# EAGLE board TQFP64-0mm8 (EAGLE 6.4)
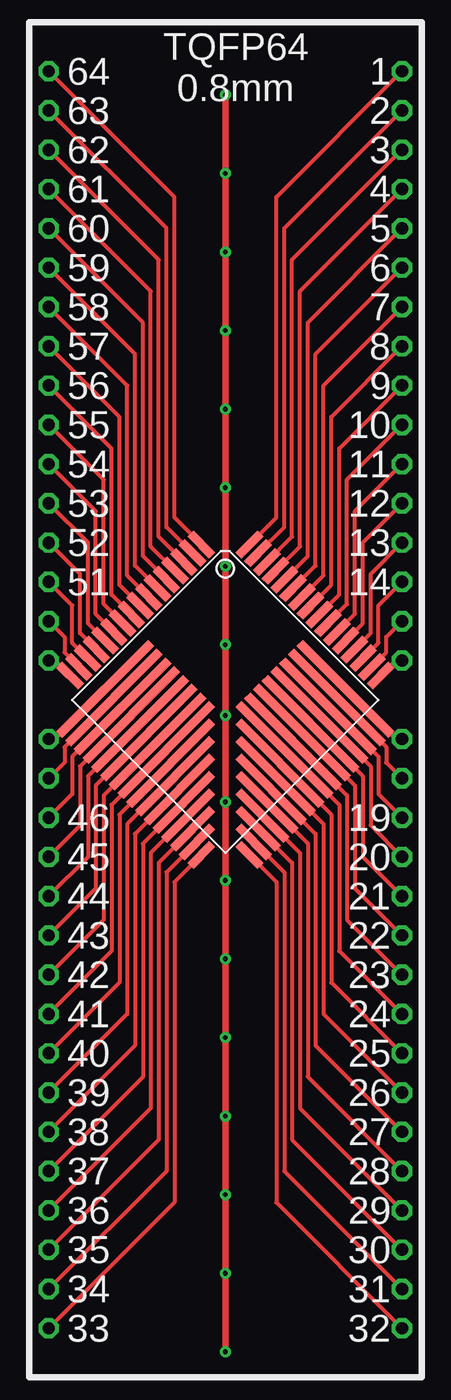
[diagram p0: board, top side]
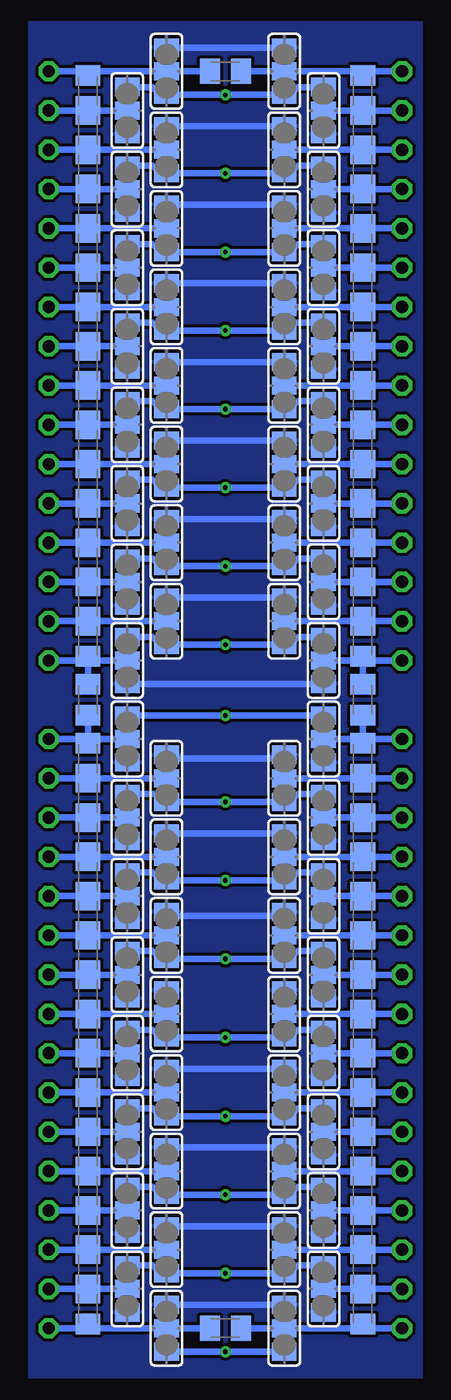
[diagram p1: board, bottom side, seen from below]

No outline drawn. Coordinates in mm, seen from the top.
Copper layers (1*16): Top 0.035mm / dielectric 1.5mm / Bottom 0.035mm
Design rules "default": minimum track width 10mil, minimum drill 0.6mm, track to track 8mil, track to pad 8mil, pad to pad 8mil, via to via 8mil, smd to smd 8mil, copper to edge 40mil, drill to drill 8mil, minimum pad ring 10mil, minimum via ring 8mil, stop-mask expansion 4mil, vias tented up to drill 0mil, thermal gap 10mil
Net classes: 1 pwr: width 0.254 mm

## Footprints (pad centres in the part's own frame; a part is rotated, then mirrored left to right if it is on the bottom)
1 = drill 0.8 octagon: P$1 0,0
TQFP64 = smd 2 x 0.55: 1 -8.2,6; 2 -8.2,5.2; 3 -8.2,4.4; 4 -8.2,3.6; 5 -8.2,2.8; 6 -8.2,2; 7 -8.2,1.2; 8 -8.2,0.4; 9 -8.2,-0.4; 10 -8.2,-1.2; 11 -8.2,-2; 12 -8.2,-2.8; 13 -8.2,-3.6; 14 -8.2,-4.4; 15 -8.2,-5.2; 16 -8.2,-6; 33 8.2,-6 | smd 0.55 x 8.4: 17 -6,-5; 18 -5.2,-5; 19 -4.4,-5; 20 -3.6,-5; 21 -2.8,-5; 22 -2,-5; 23 -1.2,-5; 24 -0.4,-5 | smd 0.55 x 7.6: 25 0.4,-5.4 | smd 0.55 x 6.8: 26 1.2,-5.8 | smd 0.55 x 6: 27 2,-6.2 | smd 0.55 x 5.2: 28 2.8,-6.6 | smd 0.55 x 4.4: 29 3.6,-7 | smd 0.55 x 3.6: 30 4.4,-7.4 | smd 0.55 x 2.8: 31 5.2,-7.8 | smd 0.55 x 2: 32 6,-8.2; 49 6,8.2; 50 5.2,8.2; 51 4.4,8.2; 52 3.6,8.2; 53 2.8,8.2; 54 2,8.2; 55 1.2,8.2; 56 0.4,8.2; 57 -0.4,8.2; 58 -1.2,8.2; 59 -2,8.2; 60 -2.8,8.2; 61 -3.6,8.2; 62 -4.4,8.2; 63 -5.2,8.2; 64 -6,8.2 | smd 2.8 x 0.55: 34 7.8,-5.2 | smd 3.6 x 0.55: 35 7.4,-4.4 | smd 4.4 x 0.55: 36 7,-3.6 | smd 5.2 x 0.55: 37 6.6,-2.8 | smd 6 x 0.55: 38 6.2,-2 | smd 6.8 x 0.55: 39 5.8,-1.2 | smd 7.6 x 0.55: 40 5.4,-0.4 | smd 8.4 x 0.55: 41 5,0.4; 42 5,1.2; 43 5,2; 44 5,2.8; 45 5,3.6; 46 5,4.4; 47 5,5.2; 48 5,6
C0805K = smd 1.3 x 1.6: 1 -1,0; 2 1,0
SJ_2 = smd 1.168 x 1.6: 1 -1.524,0; 2 0,0; 3 1.524,0

## Placement (x,y rotation side)
E$68  [1]  1.35,84.43 0 top
E$315  [1]  1.35,3.15 0 top
E$316  [1]  1.35,5.69 0 top
E$317  [1]  1.35,8.23 0 top
E$318  [1]  1.35,10.77 0 top
E$319  [1]  1.35,13.31 0 top
E$320  [1]  1.35,15.85 0 top
E$321  [1]  1.35,18.39 0 top
E$322  [1]  1.35,23.47 0 top
E$323  [1]  1.35,26.01 0 top
E$324  [1]  1.35,28.55 0 top
E$325  [1]  1.35,31.09 0 top
E$326  [1]  1.35,33.63 0 top
E$327  [1]  1.35,36.17 0 top
E$328  [1]  1.35,38.71 0 top
E$329  [1]  1.35,41.25 0 top
E$330  [1]  1.35,46.33 0 top
E$331  [1]  1.35,48.87 0 top
E$332  [1]  1.35,51.41 0 top
E$333  [1]  1.35,53.95 0 top
E$334  [1]  1.35,56.49 0 top
E$335  [1]  1.35,59.03 0 top
E$336  [1]  1.35,61.57 0 top
E$337  [1]  1.35,64.11 0 top
E$338  [1]  1.35,66.65 0 top
E$339  [1]  1.35,69.19 0 top
E$340  [1]  1.35,71.73 0 top
E$341  [1]  1.35,74.27 0 top
E$342  [1]  1.35,76.81 0 top
E$343  [1]  1.35,79.35 0 top
E$344  [1]  1.35,81.89 0 top
E$345  [1]  24.21,84.43 0 top
E$346  [1]  24.21,5.69 0 top
E$347  [1]  24.21,8.23 0 top
E$348  [1]  24.21,10.77 0 top
E$349  [1]  24.21,13.31 0 top
E$350  [1]  24.21,15.85 0 top
E$351  [1]  24.21,18.39 0 top
E$352  [1]  24.21,20.93 0 top
E$353  [1]  24.21,23.47 0 top
E$354  [1]  24.21,26.01 0 top
E$355  [1]  24.21,28.55 0 top
E$356  [1]  24.21,31.09 0 top
E$357  [1]  24.21,33.63 0 top
E$358  [1]  24.21,36.17 0 top
E$359  [1]  24.21,38.71 0 top
E$360  [1]  24.21,41.25 0 top
E$361  [1]  24.21,46.33 0 top
E$362  [1]  24.21,48.87 0 top
E$363  [1]  24.21,51.41 0 top
E$364  [1]  24.21,53.95 0 top
E$365  [1]  24.21,56.49 0 top
E$366  [1]  24.21,59.03 0 top
E$367  [1]  24.21,61.57 0 top
E$368  [1]  24.21,64.11 0 top
E$369  [1]  24.21,66.65 0 top
E$370  [1]  24.21,69.19 0 top
E$371  [1]  24.21,71.73 0 top
E$372  [1]  24.21,74.27 0 top
E$373  [1]  24.21,76.81 0 top
E$374  [1]  24.21,79.35 0 top
E$375  [1]  24.21,81.89 0 top
E$376  [TQFP64]  12.79,43.79 315 top
E$377  [1]  1.35,20.93 0 top
E$378  [1]  24.21,3.15 0 top
E$379  [C0805K]  21.68,4.42 270 bottom
E$380  [C0805K]  21.68,9.5 270 bottom
E$381  [C0805K]  21.68,14.58 270 bottom
E$382  [C0805K]  21.68,19.66 270 bottom
E$383  [C0805K]  21.68,24.74 270 bottom
E$384  [C0805K]  21.68,29.82 270 bottom
E$385  [C0805K]  21.68,34.9 270 bottom
E$386  [C0805K]  21.68,39.98 270 bottom
E$387  [C0805K]  21.68,6.96 270 bottom
E$388  [C0805K]  21.68,12.04 270 bottom
E$389  [C0805K]  21.68,17.12 270 bottom
E$390  [C0805K]  21.68,22.2 270 bottom
E$391  [C0805K]  21.68,27.28 270 bottom
E$392  [C0805K]  21.68,32.36 270 bottom
E$393  [C0805K]  21.68,37.44 270 bottom
E$394  [C0805K]  21.68,43.79 270 bottom
E$395  [C0805K]  21.68,47.6 270 bottom
E$396  [C0805K]  21.68,52.68 270 bottom
E$397  [C0805K]  21.68,57.76 270 bottom
E$398  [C0805K]  21.68,62.84 270 bottom
E$399  [C0805K]  21.68,67.92 270 bottom
E$400  [C0805K]  21.68,73 270 bottom
E$401  [C0805K]  21.68,78.08 270 bottom
E$402  [C0805K]  21.68,83.16 270 bottom
E$403  [C0805K]  21.68,50.14 270 bottom
E$404  [C0805K]  21.68,55.22 270 bottom
E$405  [C0805K]  21.68,60.3 270 bottom
E$406  [C0805K]  21.68,65.38 270 bottom
E$407  [C0805K]  21.68,70.46 270 bottom
E$408  [C0805K]  21.68,75.54 270 bottom
E$409  [C0805K]  21.68,80.62 270 bottom
E$410  [C0805K]  3.9,83.16 90 bottom
E$411  [C0805K]  3.9,78.08 90 bottom
E$412  [C0805K]  3.9,73 90 bottom
E$413  [C0805K]  3.9,67.92 90 bottom
E$414  [C0805K]  3.9,62.84 90 bottom
E$415  [C0805K]  3.9,57.76 90 bottom
E$416  [C0805K]  3.9,52.68 90 bottom
E$417  [C0805K]  3.9,47.6 90 bottom
E$418  [C0805K]  3.9,80.62 90 bottom
E$419  [C0805K]  3.9,75.54 90 bottom
E$420  [C0805K]  3.9,70.46 90 bottom
E$421  [C0805K]  3.9,65.38 90 bottom
E$422  [C0805K]  3.9,60.3 90 bottom
E$423  [C0805K]  3.9,55.22 90 bottom
E$424  [C0805K]  3.9,50.14 90 bottom
E$425  [C0805K]  3.9,43.79 90 bottom
E$426  [C0805K]  3.9,39.98 90 bottom
E$427  [C0805K]  3.9,34.9 90 bottom
E$428  [C0805K]  3.9,29.82 90 bottom
E$429  [C0805K]  3.9,24.74 90 bottom
E$430  [C0805K]  3.9,19.66 90 bottom
E$431  [C0805K]  3.9,14.58 90 bottom
E$432  [C0805K]  3.9,9.5 90 bottom
E$433  [C0805K]  3.9,4.42 90 bottom
E$434  [C0805K]  3.9,37.44 90 bottom
E$435  [C0805K]  3.9,32.36 90 bottom
E$436  [C0805K]  3.9,27.28 90 bottom
E$437  [C0805K]  3.9,22.2 90 bottom
E$438  [C0805K]  3.9,17.12 90 bottom
E$439  [C0805K]  3.9,12.04 90 bottom
E$440  [C0805K]  3.9,6.96 90 bottom
E$441  [C0805K]  12.79,84.43 180 bottom
E$442  [C0805K]  12.79,3.15 180 bottom
E$443  [SJ_2]  6.43,81.89 270 bottom
E$444  [SJ_2]  8.97,84.43 90 bottom
E$445  [SJ_2]  8.97,79.35 90 bottom
E$446  [SJ_2]  6.43,76.81 90 bottom
E$447  [SJ_2]  8.97,74.27 90 bottom
E$448  [SJ_2]  6.43,71.73 270 bottom
E$449  [SJ_2]  8.97,69.19 90 bottom
E$450  [SJ_2]  6.43,66.65 90 bottom
E$451  [SJ_2]  8.97,64.11 90 bottom
E$452  [SJ_2]  6.43,46.33 270 bottom
E$453  [SJ_2]  8.97,48.87 270 bottom
E$454  [SJ_2]  6.43,51.41 270 bottom
E$455  [SJ_2]  8.97,53.95 90 bottom
E$456  [SJ_2]  6.43,56.49 270 bottom
E$457  [SJ_2]  8.97,59.03 270 bottom
E$458  [SJ_2]  6.43,61.57 270 bottom
E$459  [SJ_2]  6.43,41.25 270 bottom
E$460  [SJ_2]  8.97,38.71 90 bottom
E$461  [SJ_2]  6.43,36.17 90 bottom
E$462  [SJ_2]  8.97,33.63 90 bottom
E$463  [SJ_2]  6.43,31.09 270 bottom
E$464  [SJ_2]  8.97,28.55 90 bottom
E$465  [SJ_2]  6.43,26.01 90 bottom
E$466  [SJ_2]  8.97,23.47 90 bottom
E$467  [SJ_2]  6.43,5.69 270 bottom
E$468  [SJ_2]  8.97,8.23 270 bottom
E$469  [SJ_2]  6.43,10.77 270 bottom
E$470  [SJ_2]  8.97,13.31 90 bottom
E$471  [SJ_2]  6.43,15.85 270 bottom
E$472  [SJ_2]  8.97,18.39 270 bottom
E$473  [SJ_2]  6.43,20.93 270 bottom
E$474  [SJ_2]  8.97,3.15 270 bottom
E$475  [SJ_2]  16.59,84.43 90 bottom
E$476  [SJ_2]  19.14,81.89 90 bottom
E$477  [SJ_2]  16.59,79.35 90 bottom
E$478  [SJ_2]  19.14,76.81 90 bottom
E$479  [SJ_2]  16.59,74.27 90 bottom
E$480  [SJ_2]  19.14,71.73 90 bottom
E$481  [SJ_2]  19.14,66.65 90 bottom
E$482  [SJ_2]  16.59,69.19 90 bottom
E$483  [SJ_2]  16.59,64.11 90 bottom
E$484  [SJ_2]  19.14,61.57 90 bottom
E$485  [SJ_2]  16.59,59.03 90 bottom
E$486  [SJ_2]  19.14,56.49 90 bottom
E$487  [SJ_2]  19.14,51.41 90 bottom
E$488  [SJ_2]  16.59,53.95 90 bottom
E$489  [SJ_2]  16.59,48.87 90 bottom
E$490  [SJ_2]  19.14,46.33 90 bottom
E$491  [SJ_2]  16.59,18.39 90 bottom
E$492  [SJ_2]  19.14,41.25 90 bottom
E$493  [SJ_2]  19.14,36.17 90 bottom
E$494  [SJ_2]  16.59,38.71 90 bottom
E$495  [SJ_2]  16.59,33.63 90 bottom
E$496  [SJ_2]  19.14,31.09 90 bottom
E$497  [SJ_2]  16.59,28.55 90 bottom
E$498  [SJ_2]  19.14,26.01 90 bottom
E$499  [SJ_2]  19.14,20.93 90 bottom
E$500  [SJ_2]  16.59,23.47 90 bottom
E$501  [SJ_2]  16.59,3.15 90 bottom
E$502  [SJ_2]  19.14,15.85 90 bottom
E$503  [SJ_2]  16.59,13.31 90 bottom
E$504  [SJ_2]  19.14,10.77 90 bottom
E$505  [SJ_2]  19.14,5.69 90 bottom
E$506  [SJ_2]  16.59,8.23 90 bottom

## Library data of the parts
E$68 E$315-E$378 = drill
E$379-E$442 = ref-packages
E$443-E$506 = jumper

## Nets
S$148: E$330.P$1 E$376.16 E$417.1 E$425.2 E$452.2
S$149: E$331.P$1 E$376.15 E$417.2 E$424.1 E$453.2
S$150: E$332.P$1 E$376.14 E$416.1 E$424.2 E$454.2
S$151: E$333.P$1 E$376.13 E$416.2 E$423.1 E$455.2
S$152: E$334.P$1 E$376.12 E$415.1 E$423.2 E$456.2
S$153: E$335.P$1 E$376.11 E$415.2 E$422.1 E$457.2
S$154: E$336.P$1 E$376.10 E$414.1 E$422.2 E$458.2
S$155: E$337.P$1 E$376.9 E$414.2 E$421.1 E$451.2
S$156: E$338.P$1 E$376.8 E$413.1 E$421.2 E$450.2
S$157: E$339.P$1 E$376.7 E$413.2 E$420.1 E$449.2
S$158: E$340.P$1 E$376.6 E$412.1 E$420.2 E$448.2
S$159: E$341.P$1 E$376.5 E$412.2 E$419.1 E$447.2
S$160: E$342.P$1 E$376.4 E$411.1 E$419.2 E$446.2
S$161: E$343.P$1 E$376.3 E$411.2 E$418.1 E$445.2
S$162: E$329.P$1 E$376.17 E$425.1 E$426.2 E$459.2
S$163: E$328.P$1 E$376.18 E$426.1 E$434.2 E$460.2
S$164: E$327.P$1 E$376.19 E$427.2 E$434.1 E$461.2
S$165: E$326.P$1 E$376.20 E$427.1 E$435.2 E$462.2
S$166: E$325.P$1 E$376.21 E$428.2 E$435.1 E$463.2
S$167: E$324.P$1 E$376.22 E$428.1 E$436.2 E$464.2
S$168: E$323.P$1 E$376.23 E$429.2 E$436.1 E$465.2
S$169: E$322.P$1 E$376.24 E$429.1 E$437.2 E$466.2
S$170: E$321.P$1 E$376.26 E$430.1 E$438.2 E$472.2
S$171: E$320.P$1 E$376.27 E$431.2 E$438.1 E$471.2
S$172: E$319.P$1 E$376.28 E$431.1 E$439.2 E$470.2
S$173: E$318.P$1 E$376.29 E$432.2 E$439.1 E$469.2
S$174: E$317.P$1 E$376.30 E$432.1 E$440.2 E$468.2
S$175: E$316.P$1 E$376.31 E$433.2 E$440.1 E$467.2
S$176: E$315.P$1 E$376.32 E$433.1 E$442.1 E$474.2
S$177: E$68.P$1 E$376.1 E$410.2 E$441.1 E$444.2
S$178: E$375.P$1 E$376.63 E$402.2 E$409.1 E$476.2
S$179: E$373.P$1 E$376.61 E$401.2 E$408.1 E$478.2
S$180: E$372.P$1 E$376.60 E$400.1 E$408.2 E$479.2
S$181: E$371.P$1 E$376.59 E$400.2 E$407.1 E$480.2
S$182: E$370.P$1 E$376.58 E$399.1 E$407.2 E$482.2
S$183: E$369.P$1 E$376.57 E$399.2 E$406.1 E$481.2
S$184: E$368.P$1 E$376.56 E$398.1 E$406.2 E$483.2
S$185: E$367.P$1 E$376.55 E$398.2 E$405.1 E$484.2
S$186: E$366.P$1 E$376.54 E$397.1 E$405.2 E$485.2
S$187: E$365.P$1 E$376.53 E$397.2 E$404.1 E$486.2
S$188: E$364.P$1 E$376.52 E$396.1 E$404.2 E$488.2
S$189: E$363.P$1 E$376.51 E$396.2 E$403.1 E$487.2
S$190: E$362.P$1 E$376.50 E$395.1 E$403.2 E$489.2
S$191: E$361.P$1 E$376.49 E$394.1 E$395.2 E$490.2
S$192: E$360.P$1 E$376.48 E$386.1 E$394.2 E$492.2
S$193: E$359.P$1 E$376.47 E$386.2 E$393.1 E$494.2
S$194: E$358.P$1 E$376.46 E$385.1 E$393.2 E$493.2
S$195: E$357.P$1 E$376.45 E$385.2 E$392.1 E$495.2
S$196: E$356.P$1 E$376.44 E$384.1 E$392.2 E$496.2
S$197: E$355.P$1 E$376.43 E$384.2 E$391.1 E$497.2
S$198: E$354.P$1 E$376.42 E$383.1 E$391.2 E$498.2
S$199: E$353.P$1 E$376.41 E$383.2 E$390.1 E$500.2
S$200: E$352.P$1 E$376.40 E$382.1 E$390.2 E$499.2
S$201: E$351.P$1 E$376.39 E$382.2 E$389.1 E$491.2
S$202: E$350.P$1 E$376.38 E$381.1 E$389.2 E$502.2
S$203: E$349.P$1 E$376.37 E$381.2 E$388.1 E$503.2
S$204: E$348.P$1 E$376.36 E$380.1 E$388.2 E$504.2
S$205: E$347.P$1 E$376.35 E$380.2 E$387.1 E$506.2
S$206: E$346.P$1 E$376.34 E$379.1 E$387.2 E$505.2
S$207: E$376.33 E$378.P$1 E$379.2 E$442.2 E$501.2
S$208: E$376.25 E$377.P$1 E$430.2 E$437.1 E$473.2
S$209: E$344.P$1 E$376.2 E$410.1 E$418.2 E$443.2
S$210: E$374.P$1 E$376.62 E$401.1 E$409.2 E$477.2
S$211: E$345.P$1 E$376.64 E$402.1 E$441.2 E$475.2
S$212 [pwr]: E$443.1 E$444.1 E$445.1 E$446.3 E$447.1 E$448.1 E$449.1 E$450.3 E$451.1 E$452.1 E$453.3 E$454.1 E$455.1 E$456.1 E$457.3 E$458.1 E$459.1 E$460.1 E$461.3 E$462.1 E$463.1 E$464.1 E$465.3 E$466.1 E$467.1 E$468.3 E$469.1 E$470.1 E$471.1 E$472.3 E$473.1 E$474.3 E$475.1 E$476.3 E$477.1 E$478.3 E$479.1 E$480.3 E$481.3 E$482.1 E$483.1 E$484.3 E$485.1 E$486.3 E$487.3 E$488.1 E$489.1 E$490.3 E$491.1 E$492.3 E$493.3 E$494.1 E$495.1 E$496.3 E$497.1 E$498.3 E$499.3 E$500.1 E$501.1 E$502.3 E$503.1 E$504.3 E$505.3 E$506.1
TQFPGND1 [pwr]: E$443.3 E$444.3 E$445.3 E$446.1 E$447.3 E$448.3 E$449.3 E$450.1 E$451.3 E$452.3 E$453.1 E$454.3 E$455.3 E$456.3 E$457.1 E$458.3 E$459.3 E$460.3 E$461.1 E$462.3 E$463.3 E$464.3 E$465.1 E$466.3 E$467.3 E$468.1 E$469.3 E$470.3 E$471.3 E$472.1 E$473.3 E$474.1 E$475.3 E$476.1 E$477.3 E$478.1 E$479.3 E$480.1 E$481.1 E$482.3 E$483.3 E$484.1 E$485.3 E$486.1 E$487.1 E$488.3 E$489.3 E$490.1 E$491.3 E$492.1 E$493.1 E$494.3 E$495.3 E$496.1 E$497.3 E$498.1 E$499.1 E$500.3 E$501.3 E$502.1 E$503.3 E$504.1 E$505.1 E$506.3

## Tracks (layer width: path | path; a pad name or v marks a point on that pad's centre or on a via)
S$148
  Top 0.254: E$376.16 1.76,46.33 E$330.P$1
  Bottom 0.406: E$330.P$1 3.39,46.33 | 3.39,46.33 3.9,46.33 E$425.2 | 3.39,46.33 3.66,46.6 E$417.1 4.17,46.33 E$452.2
S$149
  Top 0.254: E$331.P$1 2.37,47.85 2.37,46.85 E$376.15
  Bottom 0.406: E$331.P$1 3.62,48.87 | 3.62,48.87 3.9,48.87 E$417.2 4.17,48.87 E$453.2 | 3.62,48.87 E$424.1
S$150
  Top 0.254: E$376.14 2.88,47.47 2.88,49.89 E$332.P$1
  Bottom 0.406: E$332.P$1 3.62,51.41 | 3.62,51.41 3.9,51.41 E$416.1 4.17,51.41 E$454.2 | 3.62,51.41 E$424.2
S$151
  Top 0.254: E$333.P$1 3.39,51.92 3.39,48.1 E$376.13
  Bottom 0.406: E$333.P$1 3.62,53.95 | 3.62,53.95 4.4,53.95 4.13,53.68 E$416.2 4.17,53.95 E$455.2 | 3.62,53.95 E$423.1
S$152
  Top 0.254: E$334.P$1 3.9,53.95 3.9,48.72 E$376.12
  Bottom 0.406: E$334.P$1 3.62,56.49 | 3.62,56.49 4.4,56.49 4.13,56.76 E$415.1 4.17,56.49 E$456.2 | 3.62,56.49 E$423.2
S$153
  Top 0.254: E$335.P$1 4.4,55.98 4.4,49.34 E$376.11
  Bottom 0.406: E$335.P$1 3.62,59.03 | 3.62,59.03 3.9,59.03 E$415.2 4.17,59.03 E$457.2 | 3.62,59.03 E$422.1
S$154
  Top 0.254: E$336.P$1 4.91,58.01 4.91,49.97 E$376.10
  Bottom 0.406: E$336.P$1 3.39,61.57 | 3.39,61.57 3.62,61.57 E$422.2 | 3.39,61.57 3.66,61.84 E$414.1 4.17,61.57 E$458.2
S$155
  Top 0.254: E$337.P$1 5.42,60.05 5.42,50.59 E$376.9
  Bottom 0.406: E$337.P$1 3.62,64.11 | 3.62,64.11 3.9,64.11 E$414.2 4.17,64.11 E$451.2 | 3.62,64.11 E$421.1
S$156
  Top 0.254: E$338.P$1 5.93,62.08 5.93,51.21 E$376.8
  Bottom 0.406: E$338.P$1 3.62,66.65 | 3.62,66.65 3.9,66.65 E$413.1 4.17,66.65 E$450.2 7.07,66.65 | 3.62,66.65 E$421.2
S$157
  Top 0.254: E$339.P$1 6.43,64.11 6.43,51.84 E$376.7
  Bottom 0.406: E$339.P$1 3.62,69.19 | 3.62,69.19 3.9,69.19 E$413.2 4.17,69.19 E$449.2 | 3.62,69.19 E$420.1
S$158
  Top 0.254: E$340.P$1 6.94,66.14 6.94,52.46 E$376.6
  Bottom 0.406: E$340.P$1 3.62,71.73 | 3.62,71.73 3.9,71.73 E$412.1 4.17,71.73 E$448.2 | 3.62,71.73 E$420.2
S$159
  Top 0.254: E$376.5 7.45,53.08 7.45,68.17 E$341.P$1
  Bottom 0.406: E$341.P$1 3.39,74.27 | 3.39,74.27 3.62,74.27 E$419.1 | 3.39,74.27 3.66,74 E$412.2 4.17,74.27 E$447.2
S$160
  Top 0.254: E$376.4 7.96,53.71 7.96,70.21 E$342.P$1
  Bottom 0.406: E$342.P$1 3.39,76.81 | 3.39,76.81 3.62,76.81 E$419.2 | 3.39,76.81 3.66,77.08 E$411.1 4.17,76.81 E$446.2
S$161
  Top 0.254: E$376.3 8.47,54.33 8.47,72.24 E$343.P$1
  Bottom 0.406: E$343.P$1 3.39,79.35 | 3.39,79.35 4.26,79.35 E$418.1 | 3.39,79.35 3.66,79.08 E$411.2 4.17,79.35 E$445.2
S$162
  Top 0.254: E$376.17 1.76,41.25 E$329.P$1
  Bottom 0.406: E$329.P$1 3.9,41.25 | 3.9,41.25 E$426.2 4.17,41.25 E$459.2 | 3.9,41.25 E$425.1
S$163
  Top 0.254: E$376.18 2.37,40.73 2.37,39.73 E$328.P$1
  Bottom 0.406: E$328.P$1 3.62,38.71 | 3.62,38.71 3.9,38.71 E$426.1 4.17,38.71 E$460.2 | 3.62,38.71 E$434.2
S$164
  Top 0.254: E$376.19 2.88,40.11 2.88,37.69 E$327.P$1
  Bottom 0.406: E$327.P$1 3.62,36.17 | 3.62,36.17 4.4,36.17 3.9,35.66 E$427.2 4.17,36.17 E$461.2 | 3.62,36.17 E$434.1
S$165
  Top 0.254: E$376.20 3.39,39.48 3.39,35.66 E$326.P$1
  Bottom 0.406: E$326.P$1 3.62,33.63 | 3.62,33.63 4.4,33.63 4.13,33.9 E$427.1 4.17,33.63 E$462.2 | 3.62,33.63 E$435.2
S$166
  Top 0.254: E$376.21 3.9,38.86 3.9,33.63 E$325.P$1
  Bottom 0.406: E$325.P$1 3.62,31.09 | 3.62,31.09 3.9,31.09 E$428.2 4.17,31.09 E$463.2 | 3.62,31.09 E$435.1
S$167
  Top 0.254: E$376.22 4.4,38.24 4.4,31.6 E$324.P$1
  Bottom 0.406: E$324.P$1 3.62,28.55 | 3.62,28.55 3.9,28.55 E$428.1 4.17,28.55 E$464.2 | 3.62,28.55 E$436.2
S$168
  Top 0.254: E$376.23 4.91,37.61 4.91,29.57 E$323.P$1
  Bottom 0.406: E$323.P$1 3.62,26.01 | 3.62,26.01 4.4,26.01 4.13,25.74 E$429.2 4.17,26.01 E$465.2 | 3.62,26.01 E$436.1
S$169
  Top 0.254: E$376.24 5.42,36.99 5.42,27.53 E$322.P$1
  Bottom 0.406: E$322.P$1 3.62,23.47 | 3.62,23.47 3.9,23.47 E$429.1 4.17,23.47 E$466.2 | 3.62,23.47 E$437.2
S$170
  Top 0.254: E$376.26 6.43,35.74 6.43,23.47 E$321.P$1
  Bottom 0.406: E$321.P$1 3.62,18.39 | 3.62,18.39 3.9,18.39 E$430.1 4.17,18.39 E$472.2 9.61,18.39 | 3.62,18.39 E$438.2
S$171
  Top 0.254: E$376.27 6.94,35.12 6.94,21.44 E$320.P$1
  Bottom 0.406: E$320.P$1 3.62,15.85 | 3.62,15.85 3.9,15.85 4.17,15.58 | 3.62,15.85 E$438.1 | 4.17,15.58 E$431.2 4.17,15.85 E$471.2 | 4.17,15.58 4.4,15.34
S$172
  Top 0.254: E$376.28 7.45,34.5 7.45,19.41 E$319.P$1
  Bottom 0.406: E$319.P$1 3.39,13.31 | 3.39,13.31 3.62,13.31 E$439.2 | 3.39,13.31 3.66,13.58 E$431.1 4.17,13.31 E$470.2
S$173
  Top 0.254: E$376.29 7.96,33.87 7.96,17.37 E$318.P$1
  Bottom 0.406: E$318.P$1 3.62,10.77 | 3.62,10.77 3.9,10.77 E$432.2 | 3.62,10.77 E$439.1 | E$432.2 3.9,10.26 | E$432.2 4.17,10.77 E$469.2
S$174
  Top 0.254: E$376.30 8.47,33.25 8.47,15.34 E$317.P$1
  Bottom 0.406: E$317.P$1 3.62,8.23 | 3.62,8.23 3.9,8.23 E$432.1 4.17,8.23 E$468.2 | 3.62,8.23 E$440.2
S$175
  Top 0.254: E$376.31 8.97,32.63 8.97,13.31 E$316.P$1
  Bottom 0.406: E$316.P$1 3.62,5.69 | 3.62,5.69 4.4,5.69 4.13,5.42 E$433.2 4.17,5.69 E$467.2 | 3.62,5.69 E$440.1
S$176
  Top 0.254: E$376.32 9.48,32 9.48,11.28 E$315.P$1
  Bottom 0.406: E$315.P$1 3.62,3.15 | 3.62,3.15 E$433.1 | 3.62,3.15 E$474.2 E$442.1
S$177
  Top 0.254: E$376.1 9.48,55.58 9.48,76.3 E$68.P$1
  Bottom 0.406: E$410.2 3.62,84.43 E$68.P$1 E$444.2 E$441.1
S$178
  Top 0.254: E$376.63 16.59,54.95 16.59,74.27 E$375.P$1
  Bottom 0.406: E$375.P$1 21.95,81.89 | 21.95,81.89 21.68,81.89 E$402.2 21.41,81.89 E$476.2 | 21.95,81.89 E$409.1
S$179
  Top 0.254: E$376.61 17.61,53.71 17.61,70.21 E$373.P$1
  Bottom 0.406: E$373.P$1 21.95,76.81 | 21.17,76.81 21.95,76.81 | 21.95,76.81 E$408.1 | E$401.2 21.44,77.08 21.17,76.81 | 21.17,76.81 E$478.2
S$180
  Top 0.254: E$376.60 18.12,53.08 18.12,68.17 E$372.P$1
  Bottom 0.406: E$372.P$1 21.95,74.27 | 21.17,74.27 21.95,74.27 | 21.95,74.27 E$408.2 | E$400.1 21.44,74 21.17,74.27 | 21.17,74.27 E$479.2
S$181
  Top 0.254: E$376.59 18.63,52.46 18.63,66.14 E$371.P$1
  Bottom 0.406: E$371.P$1 21.95,71.73 | 21.95,71.73 21.68,71.73 21.95,72 | 21.95,71.73 E$407.1 | 21.95,72 E$400.2 21.41,71.73 E$480.2 | 21.95,72 22.18,72.24
S$182
  Top 0.254: E$376.58 19.14,51.84 19.14,64.11 E$370.P$1
  Bottom 0.406: E$370.P$1 22.18,69.19 | 22.18,69.19 21.95,69.19 E$407.2 21.41,69.19 E$482.2 | E$399.1 21.91,68.92 22.18,69.19
S$183
  Top 0.254: E$376.57 19.64,51.21 19.64,62.08 E$369.P$1
  Bottom 0.406: E$369.P$1 21.95,66.65 | 21.95,66.65 21.68,66.65 E$399.2 21.41,66.65 E$481.2 | 21.95,66.65 E$406.1
S$184
  Top 0.254: E$376.56 20.15,50.59 20.15,60.05 E$368.P$1
  Bottom 0.406: E$368.P$1 21.95,64.11 | 21.17,64.11 21.95,64.11 | 21.95,64.11 E$406.2 | E$398.1 21.44,63.84 21.17,64.11 | 21.17,64.11 E$483.2
S$185
  Top 0.254: E$376.55 20.66,49.97 20.66,58.01 E$367.P$1
  Bottom 0.406: E$367.P$1 22.18,61.57 | 22.18,61.57 21.95,61.57 E$405.1 21.41,61.57 E$484.2 | E$398.2 21.91,61.84 22.18,61.57
S$186
  Top 0.254: E$376.54 21.17,49.34 21.17,55.98 E$366.P$1
  Bottom 0.406: E$366.P$1 21.95,59.03 | 21.17,59.03 21.95,59.03 | 21.95,59.03 E$405.2 | E$397.1 21.44,58.76 21.17,59.03 | 21.17,59.03 E$485.2
S$187
  Top 0.254: E$376.53 21.68,48.72 21.68,53.95 E$365.P$1
  Bottom 0.406: E$365.P$1 21.95,56.49 | 21.17,56.49 21.95,56.49 | 21.95,56.49 E$404.1 | E$397.2 21.44,56.76 21.17,56.49 | 21.17,56.49 E$486.2
S$188
  Top 0.254: E$376.52 22.18,48.1 22.18,51.92 E$364.P$1
  Bottom 0.406: E$364.P$1 22.18,53.95 | 22.18,53.95 21.95,53.95 E$404.2 21.41,53.95 E$488.2 15.96,53.95 | E$396.1 21.91,53.68 22.18,53.95
S$189
  Top 0.254: E$376.51 22.69,47.47 22.69,49.89 E$363.P$1
  Bottom 0.406: E$363.P$1 21.95,51.41 | 21.95,51.41 21.68,51.41 E$396.2 21.41,51.41 E$487.2 | 21.95,51.41 E$403.1
S$190
  Top 0.254: E$376.50 23.2,46.85 23.2,47.85 E$362.P$1
  Bottom 0.406: E$362.P$1 21.95,48.87 | 21.17,48.87 21.95,48.87 | 21.95,48.87 E$403.2 | E$395.1 21.44,48.6 21.17,48.87 | 21.17,48.87 E$489.2
S$191
  Top 0.254: E$376.49 23.81,46.33 E$361.P$1
  Bottom 0.406: E$361.P$1 22.18,46.33 | 22.18,46.33 21.68,46.33 | 21.68,46.33 E$394.1 | E$395.2 21.91,46.6 22.18,46.33 | 21.68,46.33 E$490.2
S$192
  Top 0.254: E$376.48 23.81,41.25 E$360.P$1
  Bottom 0.406: E$386.1 21.95,41.25 E$360.P$1 21.68,41.25 | E$394.2 21.68,41.25 | 21.68,41.25 E$492.2
S$193
  Top 0.254: E$376.47 23.2,40.73 23.2,39.73 E$359.P$1
  Bottom 0.406: E$359.P$1 22.18,38.71 | 22.18,38.71 21.95,38.71 E$393.1 | 22.18,38.71 21.91,38.98 E$386.2 21.41,38.71 E$494.2 15.96,38.71
S$194
  Top 0.254: E$376.46 22.69,40.11 22.69,37.69 E$358.P$1
  Bottom 0.406: E$358.P$1 21.95,36.17 | 21.95,36.17 21.68,36.17 E$385.1 21.41,36.17 E$493.2 | 21.95,36.17 E$393.2
S$195
  Top 0.254: E$376.45 22.18,39.48 22.18,35.66 E$357.P$1
  Bottom 0.406: E$357.P$1 21.95,33.63 | 21.95,33.63 21.17,33.63 21.44,33.9 E$385.2 21.41,33.63 E$495.2 | 21.95,33.63 E$392.1
S$196
  Top 0.254: E$376.44 21.68,38.86 21.68,33.63 E$356.P$1
  Bottom 0.406: E$356.P$1 21.68,31.09 | 21.68,31.09 21.17,31.09 21.44,30.82 E$384.1 21.41,31.09 E$496.2 | 21.68,31.09 21.17,31.6 21.44,31.6 E$392.2
S$197
  Top 0.254: E$376.43 21.17,38.24 21.17,31.6 E$355.P$1
  Bottom 0.406: E$355.P$1 21.95,28.55 | 21.95,28.55 21.17,28.55 21.44,28.82 E$384.2 21.41,28.55 E$497.2 | 21.95,28.55 E$391.1
S$198
  Top 0.254: E$376.42 20.66,37.61 20.66,29.57 E$354.P$1
  Bottom 0.406: E$354.P$1 22.18,26.01 | 22.18,26.01 21.95,26.01 E$391.2 | 22.18,26.01 21.91,25.74 E$383.1 21.41,26.01 E$498.2
S$199
  Top 0.254: E$376.41 20.15,36.99 20.15,27.53 E$353.P$1
  Bottom 0.406: E$353.P$1 22.18,23.47 | 22.18,23.47 21.95,23.47 E$390.1 | 22.18,23.47 21.91,23.74 E$383.2 21.41,23.47 E$500.2
S$200
  Top 0.254: E$376.40 19.64,36.37 19.64,25.5 E$352.P$1
  Bottom 0.406: E$352.P$1 21.95,20.93 | 21.95,20.93 21.68,20.93 E$382.1 21.41,20.93 E$499.2 | 21.95,20.93 E$390.2
S$201
  Top 0.254: E$376.39 19.14,35.74 19.14,23.47 E$351.P$1
  Bottom 0.406: E$351.P$1 21.95,18.39 | 21.95,18.39 21.68,18.39 E$382.2 21.41,18.39 E$491.2 | 21.95,18.39 E$389.1
S$202
  Top 0.254: E$376.38 18.63,35.12 18.63,21.44 E$350.P$1
  Bottom 0.406: E$350.P$1 21.95,15.85 | 21.95,15.85 21.68,15.85 E$381.1 21.41,15.85 E$502.2 | 21.95,15.85 E$389.2
S$203
  Top 0.254: E$376.37 18.12,34.5 18.12,19.41 E$349.P$1
  Bottom 0.406: E$349.P$1 21.95,13.31 | 21.95,13.31 21.68,13.31 E$381.2 21.41,13.31 E$503.2 | 21.95,13.31 E$388.1
S$204
  Top 0.254: E$376.36 17.61,33.87 17.61,17.37 E$348.P$1
  Bottom 0.406: E$348.P$1 21.95,10.77 | 21.95,10.77 21.68,10.77 E$380.1 21.41,10.77 E$504.2 | 21.95,10.77 E$388.2
S$205
  Top 0.254: E$376.35 17.1,33.25 17.1,15.34 E$347.P$1
  Bottom 0.406: E$347.P$1 21.95,8.23 | 21.95,8.23 21.68,8.23 E$380.2 21.41,8.23 E$506.2 | 21.95,8.23 E$387.1
S$206
  Top 0.254: E$376.34 16.59,32.63 16.59,13.31 E$346.P$1
  Bottom 0.406: E$346.P$1 21.95,5.69 | 21.95,5.69 21.68,5.69 E$379.1 21.41,5.69 E$505.2 | 21.95,5.69 E$387.2
S$207
  Top 0.254: E$376.33 16.09,32 16.09,11.28 E$378.P$1
  Bottom 0.406: E$378.P$1 21.95,3.15 | 21.95,3.15 E$379.2 | 21.95,3.15 E$501.2 E$442.2
S$208
  Top 0.254: E$376.25 5.93,36.37 5.93,25.5 E$377.P$1
  Bottom 0.406: E$377.P$1 3.62,20.93 | 3.62,20.93 3.9,20.93 E$430.2 4.17,20.93 E$473.2 | 3.62,20.93 E$437.1
S$209
  Top 0.254: E$376.2 8.97,54.95 8.97,74.27 E$344.P$1
  Bottom 0.406: E$344.P$1 3.62,81.89 | 3.62,81.89 3.9,81.89 E$410.1 4.17,81.89 E$443.2 | 3.62,81.89 E$418.2
S$210
  Top 0.254: E$376.62 17.1,54.33 17.1,72.24 E$374.P$1
  Bottom 0.406: E$374.P$1 21.95,79.35 | 21.95,79.35 21.68,79.35 E$401.1 21.41,79.35 E$477.2 | 21.95,79.35 E$409.2
S$211
  Top 0.254: E$376.64 16.09,55.58 16.09,76.3 E$345.P$1
  Bottom 0.406: E$402.1 21.95,84.43 E$345.P$1 E$475.2 E$441.2
S$212  (via drill 0.3)
  Top 0.254: v12.78,42.78 v12.79,42.77 | v12.78,52.42 v12.79,52.43
  Top 0.406: v12.78,42.78 v12.78,47.35 v12.78,52.42 | v12.79,42.77 v12.79,37.19 v12.79,32.11 v12.79,27.03 v12.79,21.95 v12.79,16.87 v12.79,11.79 v12.79,6.71 v12.79,1.63 | v12.79,52.43 v12.79,57.51 v12.79,62.59 v12.79,67.67 v12.79,72.75 v12.79,77.83 v12.79,82.91
  Bottom 0.406: E$501.1 v12.79,1.63 E$474.3 | E$467.1 8.09,7.21 8.34,6.96 8.72,6.96 E$468.3 v12.79,6.71 E$506.1 16.85,6.96 17.23,6.96 17.48,7.21 E$505.3 | E$469.1 8.09,12.29 8.34,12.04 8.72,12.04 E$470.1 v12.79,11.79 E$503.1 16.85,12.04 17.23,12.04 17.48,12.29 E$504.3 | v12.79,16.87 E$472.3 8.72,17.12 8.34,17.12 8.09,17.37 E$471.1 | E$502.3 17.48,17.37 17.23,17.12 16.85,17.12 E$491.1 v12.79,16.87 | E$499.3 17.48,22.45 17.23,22.2 16.85,22.2 E$500.1 v12.79,21.95 E$466.1 8.72,22.2 8.34,22.2 8.09,22.45 E$473.1 | E$465.3 8.09,27.53 8.34,27.28 8.72,27.28 E$464.1 v12.79,27.03 E$497.1 16.85,27.28 17.23,27.28 17.48,27.53 E$498.3 | E$463.1 8.09,32.61 8.34,32.36 8.72,32.36 E$462.1 v12.79,32.11 E$495.1 16.85,32.36 17.23,32.36 17.48,32.61 E$496.3 | E$461.3 8.09,37.69 8.34,37.44 8.72,37.44 E$460.1 v12.79,37.19 E$494.1 16.87,37.47 17.14,37.47 17.37,37.69 E$493.3 | E$459.1 v12.79,42.77 E$492.3 | E$452.1 8.09,47.85 8.34,47.6 8.72,47.6 E$453.3 v12.78,47.35 E$489.1 16.85,47.6 17.23,47.6 17.48,47.85 E$490.3 | E$487.3 17.48,52.93 17.23,52.68 16.85,52.68 E$488.1 v12.79,52.43 E$455.1 8.72,52.68 8.34,52.68 8.09,52.93 E$454.1 | E$456.1 8.09,58.01 8.34,57.76 8.72,57.76 E$457.3 v12.79,57.51 E$485.1 16.85,57.76 17.23,57.76 17.48,58.01 E$486.3 | E$458.1 8.09,63.09 8.34,62.84 8.72,62.84 E$451.1 v12.79,62.59 E$483.1 16.85,62.84 17.23,62.84 17.48,63.09 E$484.3 | E$481.3 17.48,68.17 17.23,67.92 16.85,67.92 E$482.1 v12.79,67.67 E$449.1 8.47,68.17 E$450.3 | E$448.1 8.09,73.25 8.34,73 8.72,73 E$447.1 v12.79,72.75 E$479.1 16.85,73 17.23,73 17.48,73.25 E$480.3 | E$445.1 9.61,77.83
  Bottom 0.406: 9.61,77.83 v12.79,77.83 E$477.1 16.85,78.08 17.23,78.08 17.48,78.33 E$478.3 | E$446.3 8.09,78.33 8.34,78.08 9.36,78.08 9.61,77.83 | E$476.3 17.48,83.41 17.23,83.16 16.85,83.16 E$475.1 v12.79,82.91 E$444.1 8.72,83.16 8.34,83.16 8.09,83.41 E$443.1 | v12.79,16.87 13.42,16.87
TQFPGND1
  Bottom 0.406: 8.72,4.42 E$474.1 E$501.3 16.85,4.42 17.23,4.42 | 8.72,9.5 E$468.1 E$506.3 16.85,9.5 | E$503.3 E$470.3 8.72,14.58 8.34,14.58 | 8.34,19.66 8.72,19.66 E$472.1 E$491.3 | 8.34,24.74 8.72,24.74 E$466.3 | E$464.3 8.72,29.82 16.34,29.82 E$497.3 | 8.34,34.9 8.72,34.9 E$462.3 E$495.3 | 8.34,39.98 8.72,39.98 | 8.72,39.98 E$460.3 | 8.72,39.98 16.34,39.98 E$494.3 | E$452.3 E$490.1 | 8.34,50.14 8.72,50.14 E$453.1 E$489.3 | 8.34,55.22 8.72,55.22 E$455.3 E$488.3 | 8.34,60.3 8.72,60.3 E$457.1 E$485.3 | 8.34,65.38 8.72,65.38 E$451.3 E$483.3 | 8.34,70.46 8.72,70.46 E$449.3 E$482.3 | 17.23,75.54 16.85,75.54 E$479.3 E$447.3 8.72,75.54 8.34,75.54 | 8.34,80.62 8.72,80.62 E$445.3 E$477.3 16.85,80.62 17.23,80.62 | E$444.3 E$475.3
  pour Bottom: 0.09,87.61 25.48,87.61 25.48,-0.03 0.09,-0.03

## Text on the board
tPlace: TQFP64 / 0.8mm | 64 | 1 | 63 | 2 | 62 | 3 | 61 | 4 | 60 | 5 | 59 | 6 | 58 | 7 | 57 | 8 | 56 | 9 | 55 | 10 | 54 | 11 | 53 | 12 | 52 | 13 | 51 | 14 | 46 | 19 | 45 | 20 | 44 | 21 | 43 | 22 | 42 | 23 | 41 | 24 | 40 | 25 | 39 | 26 | 38 | 27 | 37 | 28 | 36 | 29 | 35 | 30 | 34 | 31 | 33 | 32